# Altium PCB PCB1.PcbDoc
Units mil, origin at the board's own origin, x right, y up, seen from the top; angles counter-clockwise.
Board outline 3450 x 2380 mil, 2 copper layers (Top Layer, Bottom Layer); 52 components, 36 nets, 166 pads, 55 vias.
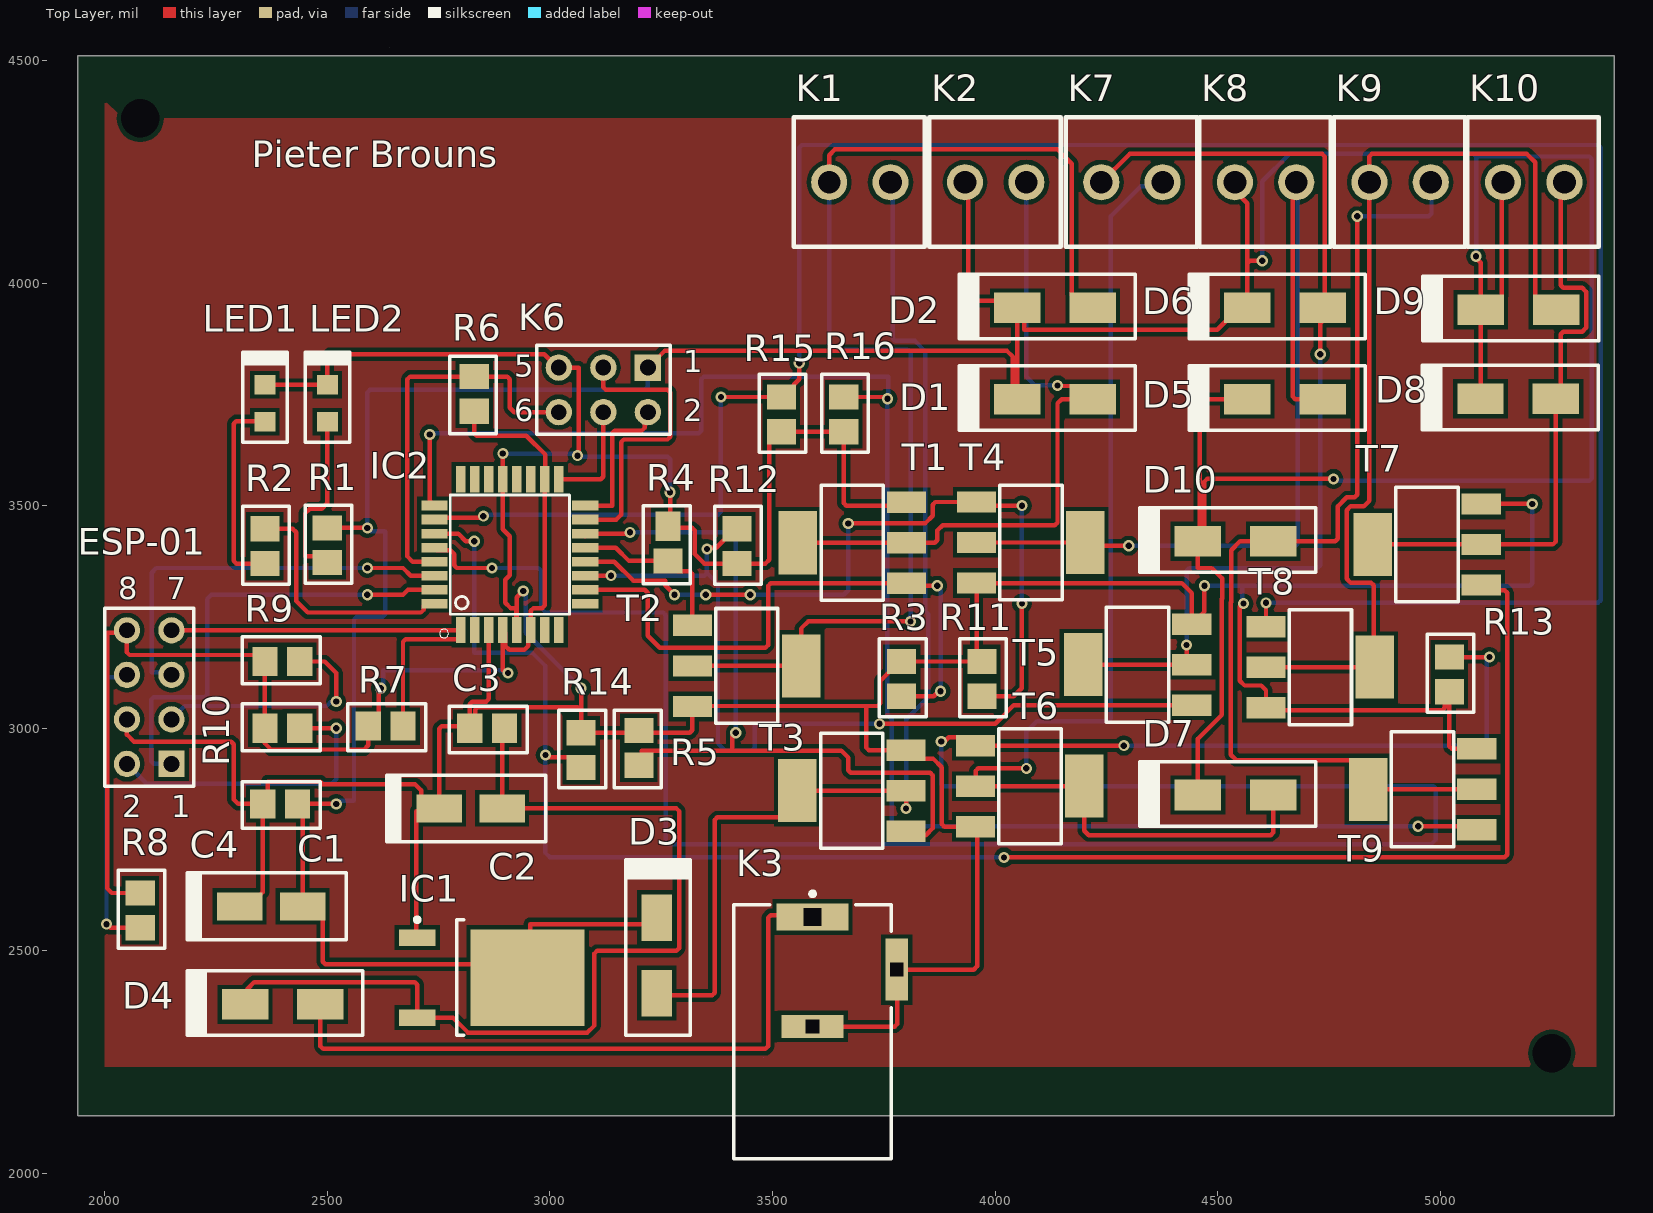
[diagram p0: Top Layer view]
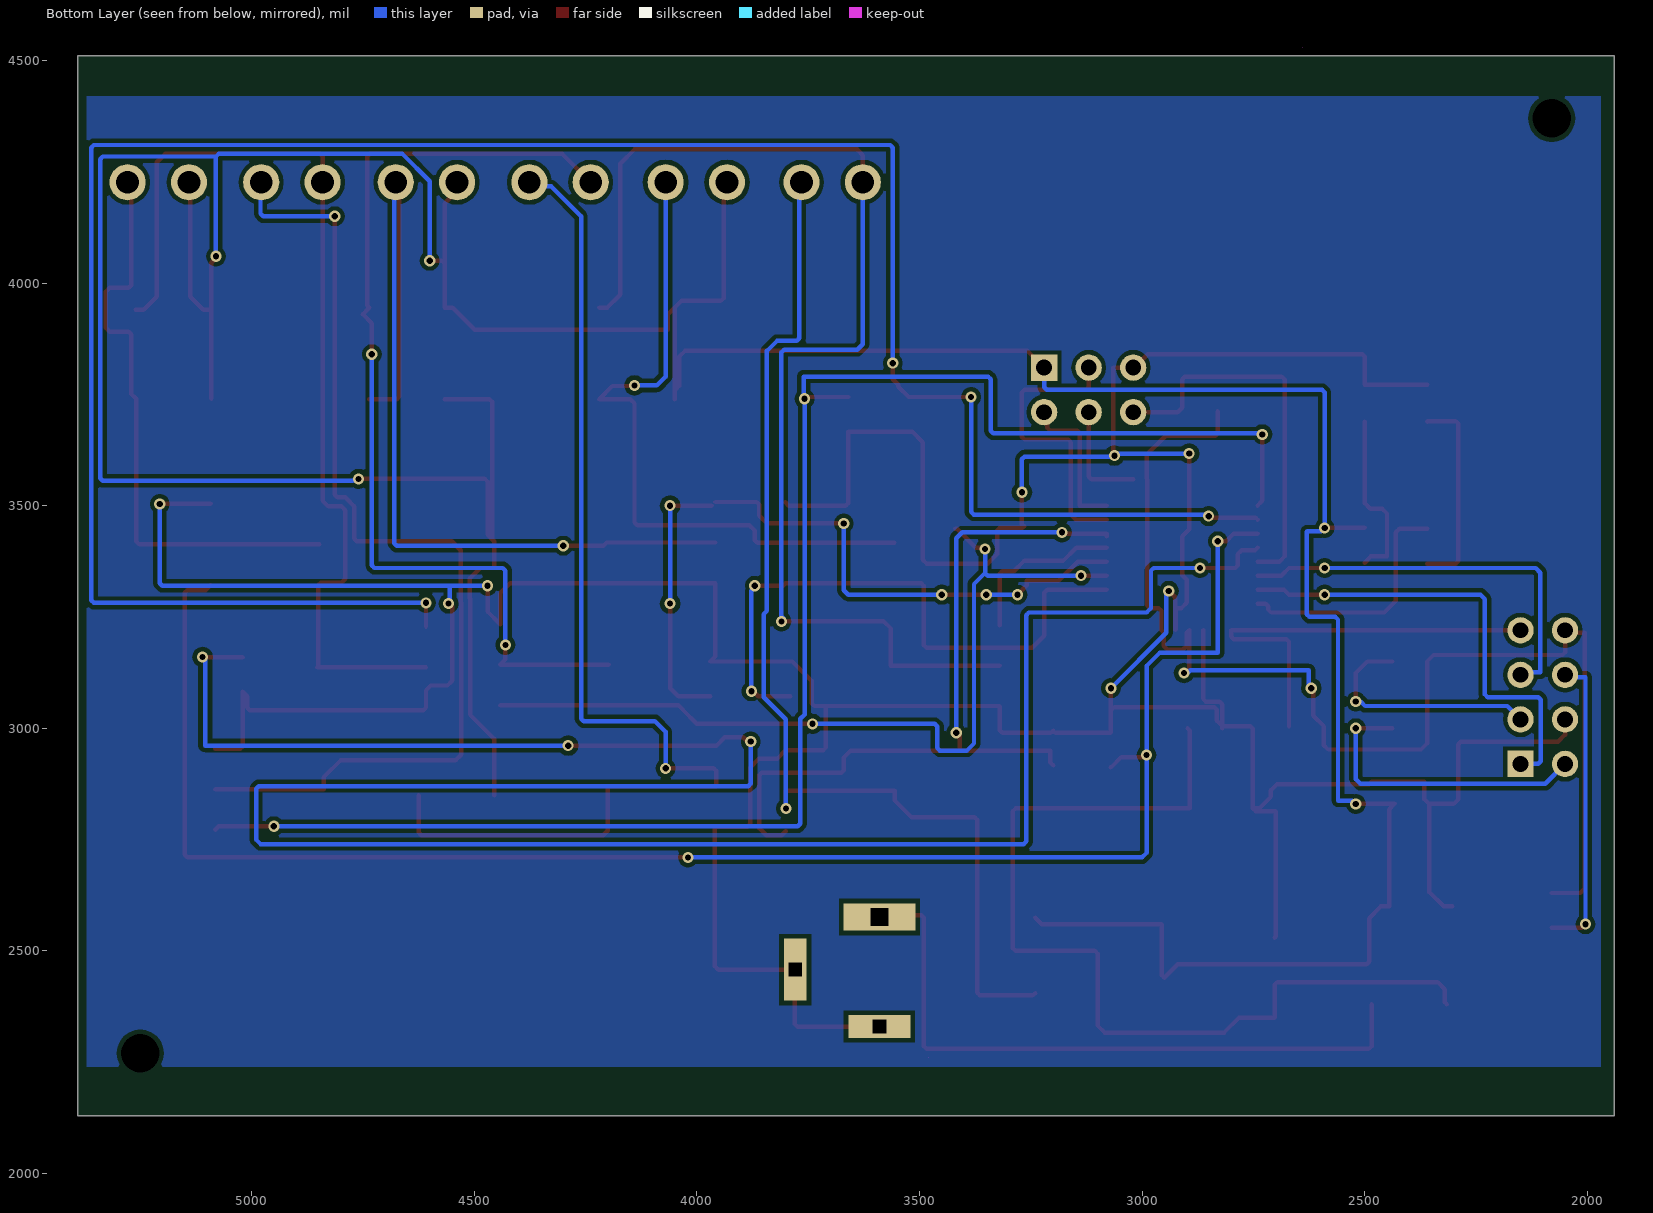
[diagram p1: Bottom Layer view, seen from below]

## Layer stack, top to bottom
Top Solder: solder mask 0.4, Solder Resist, Dk 3.5
Top Layer: signal copper 1.4
Dielectric 1: dielectric 12.6, FR-4, Dk 4.8
Bottom Layer: signal copper 1.4
Bottom Solder: solder mask 0.4, Solder Resist, Dk 3.5

## Board outline
5390,4510 5390,2130 1940,2130 1940,4500 1940,4510
cut-out: 3480,2260
cut-out: 6570,2310
cut-out: 2640,4530

## Design rules (kind name [scope] priority, off if disabled: settings)
Clearance [All] p1: gap=10 ignorepadtopadclearanceinfootprint=TRUE
HoleSize [All] p1: absolutevalues=TRUE maxlimit=200 minlimit=1 maxpercent=80.000 minpercent=20.000
MinimumSolderMaskSliver [All] p1: minsoldermaskwidth=1
PlaneClearance [All] p1: clearance=0
PlaneConnect [All] p1: planeconnectstyle=NoConnect reliefexpansion=20 reliefentries=4 reliefconductorwidth=10 reliefairgap=10
PolygonConnect [All] p1: connectstyle=NoConnect reliefconductorwidth=10 reliefentries=4 polygonreliefangle="90 Angle" airgapwidth=10
RoutingVias [All] p1: holewidth=14 width=25 viastyle="Through Hole" minholewidth=14 minwidth=25 maxholewidth=14 maxwidth=25
SilkToSilkClearance [All] p1: silktosilkclearance=0
SilkToSolderMaskClearance [IsPad] p1: minsilkscreentomaskgap=1 clearancetoexposedcopper=TRUE
SolderMaskExpansion [All] p1: expansion=4 istentingtop=FALSE
Width [All] p1: maxlimit=10 minlimit=10 preferedwidth=10
24 further rules are at their usual default settings.

## Classes and differential pairs
component class extrasheet: D5 D6 D7 D8 D9 D10 K7 K8 K9 K10 R11 R12 R13 R14 R15 R16 T4 T5 T6 T7 T8 T9
component class schema_Project: C1 C2 C3 C4 D1 D2 D3 D4 ESP-01 IC1 IC2 K1 K2 K3 K6 LED1 LED2 R1 R2 R3 R4 R5 R6 R7 R8 R9 R10 T1 T2 T3

## Components (designator, comment, footprint, x,y, rotation, side; value= is the part's Value field where it differs from the comment)
C1 "Cap" C13+R#1 2388.98,2900 r0 top value=100nF
C2 "Cap2" C24 2822.05,2820 r180 top value=10µF
C3 "Cap" C13+R#1 2853.98,3070 r0 top value=100nF
C4 "Cap2" C24 2373.98,2600 r180 top value=10µF
D1 "Diode" Diode 4134.65,3739.29 r180 top
D2 "Diode" Diode 4134.65,3944.29 r180 top
D3 "Diode" Diode 3240,2490 r90 top
D4 "Diode" Diode 2400,2380 r180 top
D5 "Diode" Diode 4650.85,3739.29 r180 top
D6 "Diode" Diode 4650.85,3944.29 r180 top
D7 "Diode" Diode 4540,2850 r180 top
D8 "Diode" Diode 5174.65,3740 r180 top
D9 "Diode" Diode 5175.35,3940 r180 top
D10 "Diode" Diode 4540,3420 r180 top
ESP-01 "K5" HDR2X4 2150,2920 r90 top
IC1 "LD1117DT33T" TO-252_N 2869.29,2439.92 r0 top
IC2 "ATMEGA328P-AU" *QFP80P900X900X120-32N 2910,3390 r90 top
K1 "K1" K12 3627.2,4226.31 r0 top
K2 "K2" K12 3932.2,4226.31 r0 top
K3 "K3" SWITCH-RAPC712X-3_V 3590,2453.03 r0 top
K6 "Header 3X2" HDR2X3 3220,3810 r180 top
K7 "K7" K12 4238.4,4226.31 r0 top
K8 "K8" K12 4538.4,4226.31 r0 top
K9 "K9" K12 4840.61,4226.31 r0 top
K10 "K10" K12 5140.61,4226.31 r0 top
LED1 "LED1" LED 2360,3730 r90 top
LED2 "LED2" LED 2500,3730 r90 top
R1 "Res2" C13+R#1 2430,3406.02 r90 top value=220
R2 "Res2" C13+R#1 2290,3403.98 r90 top value=220
R3 "Res2" C13+R#1 3720,3106.02 r90 top value=10K
R4 "Res2" C13+R#2 3335,3419.8 r270 top value=10K
R5 "Res2" C13+R#1 3270,2961.02 r270 top value=10K
R6 "Res2" C13+R#1 2900,3756.02 r270 top value=10K
R7 "Res2" C13+R#1 2626.02,3075 r0 top value=10K
R8 "Res2" C13+R#1 2010,2586.02 r90 top value=10K
R9 "Res2" C13+R#1 2403.98,3080 r180 top value=10K
R10 "Res2" C13+R#1 2403.98,2930 r180 top value=10K
R11 "Res2" C13+R#1 3900,3106.02 r90 top value=10K
R12 "Res2" C13+R#1 3350,3403.98 r90 top value=10K
R13 "Res2" C13+R#1 4950,3116.02 r90 top value=10K
R14 "Res2" C13+R#1 3000,2946.02 r90 top value=10K
R15 "Res2" C13+R#1 3450,3700 r90 top value=10K
R16 "Res2" C13+R#1 3590,3700 r90 top value=10K
T1 "NDT3055L" *SOT223-4 3679.24,3413.78 r90 top
T2 "NDT3055L" *SOT223-4 3441.7,3142.8 r270 top
T3 "NDT3055L" *SOT223-4 3678.3,2857.2 r90 top
T4 "NDT3055L" *SOT223-4 4080,3420 r270 top
T5 "NDT3055L" *SOT223-4 4320,3140 r90 top
T6 "NDT3055L" *SOT223-4 4077.69,2872.8 r270 top
T7 "NDT3055L" *SOT223-4 4970,3410 r90 top
T8 "NDT3055L" *SOT223-4 4730,3140 r270 top
T9 "NDT3055L" *SOT223-4 4960,2860 r90 top

## Footprints (in the part's own frame and the unit in brackets; to place one, negate y for a bottom-side part, rotate by r counter-clockwise, add the part's x,y. Pads: shape width x height; smd on the part's side, far side on the other; paste and mask are expansions set on the pad)
*QFP80P900X900X120-32N [mm]
  rect 1.5x0.55 smd: 1(-4.3,2.8) 2(-4.3,2) 3(-4.3,1.2) 4(-4.3,0.4) 5(-4.3,-0.4) 6(-4.3,-1.2) 7(-4.3,-2) 8(-4.3,-2.8) 17(4.3,-2.8) 18(4.3,-2) 19(4.3,-1.2) 20(4.3,-0.4) 21(4.3,0.4) 22(4.3,1.2) 23(4.3,2) 24(4.3,2.8)
  rect 0.55x1.5 smd: 9(-2.8,-4.3) 10(-2,-4.3) 11(-1.2,-4.3) 12(-0.4,-4.3) 13(0.4,-4.3) 14(1.2,-4.3) 15(2,-4.3) 16(2.8,-4.3) 25(2.8,4.3) 26(2,4.3) 27(1.2,4.3) 28(0.4,4.3) 29(-0.4,4.3) 30(-1.2,4.3) 31(-2,4.3) 32(-2.8,4.3)
  silkscreen extent -4.75,-3.4 3.4,4
*SOT223-4 [mil]
  rect 48x88 smd: 1(-88.2,-121.7) 2(2.8,-121.7) 3(93.8,-121.7)
  rect 141.73x86.61 smd: 4(2.8,122.31)
  silkscreen extent -126,-70 132,70
C13+R#1 [mm]
  rect 1.44x1.66 smd: 1(-0.863,-1.778) 2(1.117,-1.778)
  silkscreen extent -2.03,-3.17 2.41,-0.51
C13+R#2 [mm]
  rect 1.66x1.44 smd: 1(-0.863,-1.778)
  rect 1.44x1.66 smd: 2(1.117,-1.778)
  silkscreen extent -2.03,-3.18 2.41,-0.51
C24 [mm]
  rect 2.6x1.6 smd: 1(-1.8,0) 2(1.8,0)
  silkscreen extent -4.29,-1.91 4.8,1.91
Diode [mm]
  rect 2.65x1.75 smd: A(-2.15,0) K(2.15,0)
  silkscreen extent -4.57,-1.91 5.46,1.78
HDR2X3 [mm] "Connector; Header; 3x2 Position"
  rect 1.5x1.5 hole 0.9: 1(0,0)
  round 1.5 hole 0.9: 2(0,2.54) 3(2.54,0) 4(2.54,2.54) 5(5.08,0) 6(5.08,2.54)
  silkscreen extent -1.27,-1.27 6.35,3.81
HDR2X4 [mm] "Connector; Header; 4x2 Position"
  rect 1.5x1.5 hole 0.9: 1(0,0)
  round 1.5 hole 0.9: 2(0,2.54) 3(2.54,0) 4(2.54,2.54) 5(5.08,0) 6(5.08,2.54) 7(7.62,0) 8(7.62,2.54)
  silkscreen extent -1.27,-1.27 8.89,3.81
K12 [mm]
  round 2.062 hole 1.3: 1(0,0) 2(3.5,0)
  silkscreen extent -2.03,-3.68 5.46,3.72
LED [mm]
  rect 1.1x1.2 smd: A(-1.05,0) K(1.05,0)
  silkscreen extent -2.23,-1.27 2.92,1.27
SWITCH-RAPC712X-3_V [mm] "CONN, 3-Leads, Body 14.5x9mm"
  rect 4.1x1.55 hole 1.01 square: 1(0,3.125)
  rect 3.55x1.3 hole 0.76 square: 2(0,-3.125)
  rect 1.3x3.55 hole 0.76 square: 3(4.8,0.125)
  silkscreen extent -4.5,-10.67 4.5,4.57, body extent -4.5,-10.68 4.5,3.83, height 11
TO-252_N [mm] "D-PAK, 4-Leads, Body 6.1x6.5mm, Pitch 2.28mm, Lead Span 9.7mm, IPC Medium Density"
  rect 2.1x0.95 smd: 1(-4.25,2.28) 3(-4.25,-2.28)
  rect 6.5x5.5 smd: 4(2.05,0)
  silkscreen extent -4.37,-3.3 -1.6,3.43, body extent -2,-3.3 4.2,3.3, height 2.4

## Part data
C1 C2 C3 C4: "Capacitor", Publisher="Altium Limited"
  C1 C3: LatestRevisionDate=17-Jul-2002, LatestRevisionNote="Re-released for DXP Platform.", PackageDescription="Radial Cap, Thru-Hole; 2 Leads; 0.3 in Pin Spacing", PackageReference=RAD-0.3, Published=8-Jun-2000
  C2 C4: PackageDescription="Capacitor; 2 Leads", PackageReference=CAPR5-4X5, Published=23-Sep-2002
D1 D2 D3 D4 D5 D6 D7 D8 D9 D10: "Default Diode", Code_JEDEC=DO-214-AB, LatestRevisionDate=17-Jul-2002, LatestRevisionNote="Re-released for DXP Platform.", PackageDescription="DO-214-AB/SMC; 2 C-Bend Leads; Body 7.9 x 5.9 mm, inc. leads (LxW)", PackageReference=SMC, PackageVersion=Sep-1996, Published=8-Jun-2000, Publisher="Altium Limited"
IC1: library part CMP-0244-00088-1, "Fixed Low Drop Positive Voltage Regulator, 3.3V, 3-Pin DPAK, Tape and Reel", ComponentLink1Description="Manufacturer URL", ComponentLink1URL=http://www.st.com, ComponentLink2Description=Datasheet, ComponentLink2URL=http://www.st.com/internet/com/TECHNICAL_RESOURCES/TECHNICAL_LITERATURE/DATASHEET/CD00000544.pdf, DatasheetVersion=1/11/2011, PackageDescription="3-Pin Transistor Outline Package 2.28 mm Pitch, 9.7 mm Lead Span (DPAK)", PackageReference=TO-252, PackageVersion=2011
IC2: library part Component_1
K1 K2 K7 K8 K9 K10: library part "Header 2", "Header, 2-Pin", LatestRevisionDate=17-Jul-2002, LatestRevisionNote="Re-released for DXP Platform.", Publisher="Altium Limited"
K3: library part CMP-2000-05384-1, "Power Jack, 5 A, 3-Pin THD, RoHS, Bulk", Color=Black, Current Rating=5A, Manufacturer=Switchcraft, Standard Package=2,500, Catalog Drawings="RAPC7(1,2)2XSide /  / RAPC7(1,2)2XTop", Category=Connectors,Interconnects, Connector Type=Jack, Contact Material=Brass, Contact Material - Plating=Nickel, Datasheet URL=http://www.mouser.com/ds/2/393/rapc722x_cd-371352.pdf, Datasheet Version="Rev. A, 08/2005", Dynamic Catalog=SwitchcraftInc, Family=Barrel-PowerConnectors, Gender=Male, Housing Color=Black, Housing Material=Thermoplastic, Internal Switch(s)=SingleSwitch,NormallyClosed, Manufacturer URL=http://www.switchcraft.com/, Mating Products="S765-ND / -CONNPLUGMINIPWR2CONDWHT/RED / S760K-ND / -CONNPOWERPLUGMINI.08\"BLACK / SC1052-ND / -CONNPOWERPLUGMINIBLACK", Mounting Type=ThroughHole,RightAngle, Number of Positions/Contacts=2Conductors,2Contacts, Other Names="Q2287470A / RAPC722X-ND / SC1313", Plug/Mating Plug Diameter=2.1mmID,5.5mmOD, RoHS Information=SwitchcraftRoHSInfo, Shielding=Unshielded, Termination=SolderEyelet(s)
K6: "Header, 3-Pin, Dual row", LatestRevisionDate=17-Jul-2002, LatestRevisionNote="Re-released for DXP Platform.", Publisher="Altium Limited"
LED1: "Typical RED GaAs LED", LatestRevisionDate=08-Jul-2005, LatestRevisionNote="Mech Layer 1 removed.", PackageDescription="LED; 2 Leads", PackageReference=LED-1, Published=8-Jun-2000, Publisher="Altium Limited"
LED2: "Typical RED, GREEN, YELLOW, AMBER GaAs LED", LatestRevisionDate=17-Jul-2002, LatestRevisionNote="Re-released for DXP Platform.", PackageDescription="SM LED; 2 Flat Leads", PackageReference=3.2X1.6X1.1, PackageVersion=Feb-2002, Published=8-Jun-2000, Publisher="Altium Limited"
R1 R2 R3 R4 R5 R6 R7 R8 R9 R10 R11 R12 R13 R14 R15 R16: "Resistor", LatestRevisionDate=17-Jul-2002, LatestRevisionNote="Re-released for DXP Platform.", PackageDescription="Axial Device, Thru-Hole; 2 Leads; 0.4 in Pin Spacing", PackageReference=AXIAL-0.4, Published=8-Jun-2000, Publisher="Altium Limited"
T1 T2 T3 T4 T5 T6 T7 T8 T9: SnapEDA_Link=https://www.snapeda.com/parts/NDT3055L/ON%20Semiconductor/view-part/2773473/?ref=snap

## Free pads (board coordinates)
  round 0 hole 86.61: 2(2080,4370) 2(5250,2270)

## Via types
v1: diameter 25, hole 14, Top Layer to Bottom Layer, 55 vias

## Nets (pads, with @x,y where several pads share a name; then routed paths per layer and width w, separated by ;. In a path a pad name is that pad's centre, name@x,y a point inside that pad or via, vN(x,y) a via of type N, cw(c..) or ccw(c..) an arc to the next point about the centre after c; other vN are vias at no path point)
3.3V: C1.2 C4.1 D1.K D2.K D3.K D5.K D6.K D7.K D8.K D9.K D10.K IC1.4 K2.1 K6.1 K8.1 K10.1 R1.2 | length 10204.3
  Top Layer w10: R1.2 v1(2590,3450) ; v1(2520,2830) C1.2 2444.84,2818.11 C4.1 2463.5,2600 2490,2573.5 2490,2475.86 2495.86,2470 2919.92,2470 IC1.4 2955.86,2445.78 2955.86,2560 3225.35,2560 D3.K ; K6.1 3257.5,3847.5 4026.64,3847.5 4040,3834.14 4040,3768.74 4048.74,3760 D1.K@4050,3760 ; K2.1 3940,4218.52 3940,3965.86 3945.86,3960 4034.29,3960 D2.K ; D1.K D1.K@4050,3760 ; D7.K 4455.35,2976.24 4509.3,3030.19 4509.3,3290.71 4510,3291.41 4510,3336.57 4486.57,3360 4455.35,3360 D10.K D10.K@4460,3424.65 ; K8.1 4538.4,4207.05 4566.2,4179.25 4566.2,4043.8 ; D5.K 4465.86,3739.29 4460,3733.43 D10.K@4460,3424.65 ; v1(4600,4050) 4572.4,4050 4566.2,4043.8 ; v1(4760,3560) 4475.86,3560 4470,3554.14 4470,3434.65 D10.K@4460,3424.65 ; v1(5080,4060) 5080,4055.94 5090.71,4045.23 D9.K ; D8.K 5090.71,3740.71 D9.K ; K10.1 5137.87,4223.58 5137.87,3969.45 5108.42,3940 D9.K ; D1.K@4050,3760 D2.K ; D2.K 4065.16,3929.14 4065.16,3894.84 4499.03,3894.84 4548.48,3944.29 D6.K 4566.2,4043.8
  Bottom Layer w10: v1(2520,2830) 2527.65,2837.65 2559.37,2837.65 2560,2838.28 2560,3244.14 2565.86,3250 2624.14,3250 2630,3255.86 2630,3441.72 2629.37,3442.35 2597.65,3442.35 v1(2590,3450) 2590,3754.14 2595.86,3760 3214.14,3760 3220,3765.86 K6.1 ; v1(4600,4050) 4600,4228.73 4661.27,4290 5074.14,4290 5080,4284.14 ; v1(4760,3560) 4762.87,3557.13 4772.09,3557.13 4773.36,3555.86 5334.14,3555.86 5340,3561.72 5340,4278.28 5334.14,4284.14 5080,4284.14 ; v1(5080,4060) 5080,4284.14
12V: D4.A K3.1 | length 1496.7
  Top Layer w10: D4.A 2484.65,2285.86 2490.5,2280 3484.14,2280 3490,2285.86 3490,2574.14 3495.86,2580 3586.06,2580 K3.1
GND: C1.1 C2.2 C3.1 C4.2 ESP-01.4 IC1.1 IC2.3 IC2.5 IC2.21 K3.2 K3.3 K6.5 LED1.K LED2.K R3.2 R4.1 R5.1 R11.2 R12.1 R13.1 R14.2 R15.1 R16.1 T1.3 T2.3 T3.3 T4.3 T5.3 T6.3 T7.3 T8.3 T9.3 | length 10955.5
  Top Layer w10: ESP-01.4 2050,2985.86 2065.86,2970 2284.14,2970 2290,2964.14 2290,2840 2300,2830 C1.1 ; C4.2 2322.8,2600 2355,2632.21 C1.1 ; LED1.K LED2.K 2500,3834.14 2505.86,3840 2987.03,3840 3017.03,3810 K6.5 3064.14,3810 3064.53,3809.61 v1@3064.53,3614.53 ; IC1.1 2700,2531.65 2700,2814.14 2745.32,2814.14 C2.2 ; C3.1 C3.1@2820,3005 ; IC2.3 2862.76,3065.86 2856.9,3060 2825.86,3060 2820,3054.14 C3.1@2820,3005 ; v1(2894.25,3617.06) IC2.21 2894.25,3446.97 2910,3431.22 2910,3343.43 2900,3333.43 2900,3281.61 2911.61,3270 2924.14,3270 2924.14,3222.31 IC2.5 2925.75,3294.25 v1(2940,3308.5) ; v1(3070,3090) 3070,3040 ; v1(3270,3530) 3270,3458.78 R4.1 3268.78,3450 3319.4,3450 3325.26,3444.14 3325.26,3391.37 3346.62,3370 R12.1 3484.14,3370 3492.32,3378.18 3492.32,3642.68 3515.67,3666.02 R15.1 R16.1 3660,3505.86 3665.86,3500 3793.36,3500 T1.3 ; K3.2 3774.14,2330 3780,2335.86 3780,2456.93 K3.3 3952.05,2457.95 3960,2465.9 3960,2774.99 T6.3 3885.86,2779 3880,2784.86 3880,2912.43 3860.43,2932 3819,2932 T3.3 3715.86,2951 3710,2956.86 3710,3050 ; v1(4470,3320) 4470,3262.1 T5.3 4441.7,3303.65 4419.15,3326.2 T4.3 3958.3,3161.7 R11.2 R3.2 3785.67,3150 3742.32,3106.65 3742.32,3055.86 3736.46,3050 3710,3050 ; v1(4557.5,3280) 4555.16,3280 4549.3,3274.14 4549.3,3106.99 4560.19,3096.09 4597.41,3096.09 4608.3,3085.2 T8.3 4614.5,3040 5004.14,3040 5010,3045.86 5010,3072.05 R13.1 5020,2959.66 5025.86,2953.8 T9.3 ; T7.3 v1(5206.2,3503.8) ; C1.1 2365.86,2840.86 2365.86,2880 2484.14,2880 2490,2874.14 2697.04,2874.14 2710.54,2860.64 2710.54,2846.5 2737.04,2820 C2.2 ; C2.2 2751.18,2998.82 2757.36,3005 C3.1@2820,3005 ; C3.1@2820,3005 2831.82,3016.82 2831.82,3041.82 2837.68,3047.68 3062.32,3047.68 3070,3040 ; 3070,3040 R14.2 3195,2990 R5.1 3205,2990 3314.14,2990 3320,2995.86 T2.3 3321,3050 3710,3050
  Bottom Layer w10: v1(2894.25,3617.06) 3057.46,3617.06 v1(3062.26,3612.26) 3064.53,3610 3264.14,3610 3270,3604.14 v1(3270,3530) ; v1(2940,3308.5) 2945.75,3302.76 2945.75,3214.25 v1(3070,3090) ; v1(4470,3320) 4554.63,3320 ; v1(4557.5,3280) 4554.63,3282.87 4554.63,3320 ; v1(5206.2,3503.8) 5206.2,3325.86 5200.34,3320 4554.63,3320
NetC2_1: C2.1 C3.2 D4.K IC1.3 | length 2165.9
  Top Layer w10: D4.K 2320,2384.65 2320,2414.14 2335.86,2430 2696.11,2430 2701.97,2424.14 IC1.3 2782.33,2350.16 2815.83,2316.65 3084.17,2316.65 3100,2332.49 3100,2494.14 3105.86,2500 3284.14,2500 3290,2505.86 3290,2814.14 3284.14,2820 C2.1 2892.91,2994.96 C3.2
NetD1_A: D1.A K2.2 T1.2 T1.4 | length 1572.3
  Top Layer w10: T1.4 T1.2 3864.14,3416.58 3870,3422.44 3870,3444.14 3882.06,3456.2 4134.14,3456.2 4140,3462.06 4140,3730 4149.29,3739.29 D1.A 4189.84,3768.74 4141.26,3768.74 v1(4140,3770)
  Bottom Layer w10: K2.2 4070,3790 4090,3770 v1(4140,3770)
NetD2_A: D2.A K1.1 T2.2 T2.4 | length 2721.4
  Top Layer w10: T2.2 T2.4 3564.01,3224.01 3580,3240 v1(3810,3240) ; K1.1 3627.2,4287.2 3640,4300 4140,4300 4172.13,4267.87 4172.13,3973.74 4201.58,3944.29 D2.A
  Bottom Layer w10: K1.1 3627.2,3862.8 3640,3850 3804.14,3850 3810,3844.14 3810,3251.38 3804.31,3245.69 v1(3810,3240)
NetD3_A: D3.A K1.2 T3.2 T3.4 | length 2521
  Top Layer w10: D3.A 3245.35,2400 3364.14,2400 3370,2405.86 3370,2794.14 3375.86,2800 3517.68,2800 3555.99,2838.31 T3.4 T3.2 v1(3800,2820)
  Bottom Layer w10: K1.2 3770,4221.31 3770,3875.86 3775.86,3870 3820,3870 3842.5,3847.5 3842.5,3264.07 3850,3256.57 3850,3070 3800,3020 v1(3800,2820)
NetD5_A: D5.A K8.2 T4.2 T4.4 | length 2093.2
  Top Layer w10: T4.2 T4.4 4209.51,3410 v1(4300,3410) ; K8.2 4668.33,4218.44 4668.33,3745.15 4674.18,3739.29 D5.A
  Bottom Layer w10: v1(4300,3410) 4674.14,3410 4680,3415.86 4680,4222.51 K8.2
NetD6_A: D6.A K7.1 T5.2 T5.4 | length 2229.9
  Top Layer w10: T5.4 T5.2 4430,3154.5 v1(4430,3187.3) ; K7.1 4302.09,4290 4734.14,4290 4740,4284.14 4740,3948.8 D6.A 4750,3929.78 4730,3909.78 v1(4730,3840)
  Bottom Layer w10: v1(4430,3187.3) 4430,3354.14 4435.86,3360 4724.14,3360 4730,3365.86 v1(4730,3840)
NetD7_A: D7.A K7.2 T6.2 T6.4 | length 2570.2
  Top Layer w10: v1(4070,2910) 3961.85,2910 3955.99,2904.14 T6.2 T6.4 4200,2770 4210,2760 4618.79,2760 4624.65,2765.86 D7.A
  Bottom Layer w10: v1(4070,2910) 4070,2991.72 4094.14,3015.86 4254.14,3015.86 4260,3021.72 4260,4150 4326.95,4216.95 4366.84,4216.95 K7.2
NetD8_A: D8.A K10.2 T7.2 T7.4 | length 1328.7
  Top Layer w10: T7.4 T7.2 5252.8,3412.8 5259.29,3419.29 D8.A 5270,3750.71 5270,3884.69 5275.86,3890.55 5318.38,3890.55 5327.17,3899.34 5327.17,3980.66 5318.38,3989.45 5275.86,3989.45 5270,3995.31 5270,4217.91 K10.2 K10.2@5280,4224.72
NetD9_A: D9.A K9.1 T8.2 T8.4 | length 2235.6
  Top Layer w10: T8.2 T8.4 4850,3139.51 4850,3321.08 4844.14,3326.93 4798.17,3326.93 4789.38,3335.72 4789.38,3489.88 4798.17,3498.67 4828.28,3498.67 4840.61,3510.99 K9.1 4840,4226.92 4850,4236.92 4840,4246.92 4840,4284.14 4845.86,4290 5194.14,4290 5212.83,4271.31 5212.83,3969.45 5242.28,3940 D9.A
NetD10_A: D10.A K9.2 T9.2 T9.4 | length 2303.4
  Top Layer w10: v1(4813.11,4150) 4813.11,3524.52 4807.25,3518.67 4789.89,3518.67 4769.38,3498.16 4769.38,3425.86 4763.53,3420 D10.A 4550,3420 4530,3400 4530,3283.13 4529.3,3282.43 4529.3,2940.7 4541.33,2928.67 4799.38,2928.67 4837.69,2890.36 T9.4 T9.2
  Bottom Layer w10: v1(4813.11,4150) 4974.14,4150 4980,4155.86 4980,4224.72 K9.2
NetESP-01_1: ESP-01.1 IC2.31 | length 1050.2
  Top Layer w10: v1(2590,3300) 2670,3300 2681.26,3311.26 IC2.31
  Bottom Layer w10: ESP-01.1 2110.39,2920 2104.53,2925.86 2104.53,3064.14 2110.39,3070 2224.14,3070 2230,3075.86 2230,3290 2240,3300 v1(2590,3300)
NetESP-01_2: ESP-01.2 R10.1 | length 688.9
  Top Layer w10: R10.1 v1(2520,3000)
  Bottom Layer w10: ESP-01.2 2094.53,2875.47 2509.61,2875.47 2520,2885.86 v1(2520,3000)
NetESP-01_3: ESP-01.3 R9.1 | length 543.5
  Top Layer w10: R9.1 2494.14,3150 2520,3124.14 v1(2520,3060)
  Bottom Layer w10: ESP-01.3 2180,3050 2499.18,3050 2509.18,3060 v1(2520,3060)
NetESP-01_5: ESP-01.5 IC2.30 | length 917.4
  Top Layer w10: v1(2590,3360) 2670,3360 2687.24,3342.76 IC2.30
  Bottom Layer w10: ESP-01.5 2144.14,3125.86 2105.47,3125.86 2105.47,3349.61 2115.86,3360 v1(2590,3360)
NetESP-01_6: ESP-01.6 R8.1 | length 681.6
  Top Layer w10: v1(2004.1,2560) 2012.05,2552.05 R8.1
  Bottom Layer w10: v1(2004.1,2560) 2004.1,3114.1 2044.1,3114.1 ESP-01.6
NetESP-01_7: ESP-01.7 IC2.1 R7.2 | length 988.7
  Top Layer w10: ESP-01.7 2799.06,3220 IC2.1 2799.76,3205.83 2793.94,3200 2675.86,3200 2670,3194.14 R7.2
NetESP-01_8: ESP-01.8 IC2.4 IC2.6 IC2.18 R6.2 R7.1 R8.2 R9.2 R10.2 | length 2834.8
  Top Layer w10: R8.2 2015.86,2630 2005.47,2640.39 2005.47,3214.14 2044.14,3214.14 ESP-01.8 2050,3170.39 2055.86,3164.53 2345.47,3164.53 R9.2 R10.2 2360,2965.86 2373.54,2952.32 2582.32,2952.32 2592.05,2962.05 R7.1 2615.39,3028.35 2615.39,3085.39 v1(2620,3090) ; R6.2 2830,3662.92 2835.86,3657.06 2947.08,3657.06 2990,3614.14 2990,3560.55 IC2.18 2988.74,3275.86 2982.88,3270 2963.1,3270 2957.24,3264.14 IC2.6 2951.57,3215.04 2951.57,3184.97 2942.79,3176.18 2908.71,3176.18 2899.92,3184.97 2899.92,3215.04 IC2.4 2894.25,3130.11
  Bottom Layer w10: v1(2620,3090) 2625.86,3095.86 2625.86,3130 2891.5,3130 2901.5,3120 v1(2905.75,3124.25)
NetIC2_10: IC2.10 R3.1 T1.1 | length 1373
  Top Layer w10: IC2.10 3212.88,3311.26 3220,3304.14 3220,3208 3246.93,3181.07 3484.14,3181.07 3490,3186.93 3490,3319.72 3495.86,3325.58 T1.1 3806.52,3320 v1(3870,3320) ; R3.1 3862.05,3072.05 3870,3080 3870.33,3080 3873.44,3083.11 v1(3877.5,3083.11)
  Bottom Layer w10: v1(3870,3320) 3870,3315.94 3877.5,3308.44 v1(3877.5,3083.11)
NetIC2_13: IC2.13 R4.2 T2.1 | length 380.8
  Top Layer w10: IC2.13 3147.68,3405.75 3177.61,3375.83 R4.2 3288.35,3352.48 3314.14,3352.48 3320,3346.62 T2.1
NetIC2_14: IC2.14 R5.2 T3.1 | length 1748.1
  Top Layer w10: IC2.14@3079.29,3431.57 IC2.14 3177.24,3437.24 v1(3180,3440) ; R5.2 3205.86,2922.91 3205.86,2950 3410,2950 ; v1(3417.5,2990) 3410,2982.5 3410,2950 ; T3.1 3809,2760 3844.14,2760 3860,2775.86 3860,2894.14 3854.14,2900 3675.86,2900 3670,2905.86 3670,2934.14 3654.14,2950 3410,2950
  Bottom Layer w10: v1(3180,3440) 3404.14,3440 3417.5,3426.64 v1(3417.5,2990)
NetIC2_15: IC2.15 K6.3 | length 661.6
  Top Layer w10: IC2.15 3148.74,3468.74 3160,3480 3160,3642.75 3165.86,3648.61 3264.14,3648.61 3270,3654.47 3270,3754.14 3264.14,3760 3125.86,3760 3120,3765.86 K6.3
NetIC2_16: IC2.16 K6.2 | length 339.6
  Top Layer w10: IC2.16 3079.53,3500 3140,3500 3140,3662.75 3145.86,3668.61 3206.7,3668.61 3212.56,3674.47 3212.56,3702.56 K6.2
NetIC2_17: IC2.17 K6.4 | length 247
  Top Layer w10: IC2.17 3114.14,3559.29 3120,3565.15 K6.4
NetIC2_29: IC2.29 K6.6 R6.1 | length 876.9
  Top Layer w10: IC2.29 2691.61,3374.25 2680,3385.86 2680,3784.14 2685.86,3790 R6.1 2904.14,3790 2910,3784.14 2910,3720 2920,3710 K6.6
NetIC2_32: IC2.32 R2.2 | length 561.8
  Top Layer w10: R2.2 2422.05,3447.95 2430,3440 2430,3285.86 2455.86,3260 2710.32,3260 2716.18,3265.86 2716.18,3273.94 2722.01,3279.76 IC2.32
NetLED1_A: LED1.A R2.1 | length 453.7
  Top Layer w10: R2.1 2295.86,3370 2290,3375.86 2290,3684.14 2295.86,3690 2358.66,3690 LED1.A
NetLED2_A: LED2.A R1.1 | length 394.7
  Top Layer w10: R1.1 2486.19,3385.86 2450,3385.86 2450,3482.24 2461.11,3493.35 2487.49,3493.35 2500,3505.86 LED2.A
PB0: IC2.12 R11.1 T4.1 | length 1705.3
  Top Layer w10: IC2.12 3144.64,3374.25 3187.63,3331.26 3258.74,3331.26 3258.74,3321.26 v1(3280,3300) ; v1(3350,3300) v1(3450,3300) ; v1(3670,3460) 3842.57,3460 3859.94,3477.37 3859.94,3502.34 3865.8,3508.2 T4.1 ; T4.1@3966.5,3500 v1(4060,3500) ; R11.1 4042.05,3072.05 4060,3090 v1(4060,3280)
  Bottom Layer w10: v1(3280,3300) v1(3350,3300) ; v1(3450,3300) 3660,3300 3670,3310 v1(3670,3460) ; v1(4060,3280) v1(4060,3500)
PC2: IC2.25 R16.2 T9.1 | length 3744.6
  Top Layer w10: v1(2730,3660) 2730,3510.94 IC2.25 ; R16.2 3753.98,3743.98 v1(3757.95,3740) ; v1(4950,2780) 5073.5,2780 T9.1
  Bottom Layer w10: v1(2730,3660) 2732.26,3662.26 3334.14,3662.26 3340,3668.12 3340,3784.14 3345.86,3790 3760,3790 3760,3742.05 v1(3757.95,3740) 3757.95,3030.94 3767.5,3021.39 3767.5,2785.86 3773.36,2780 v1(4950,2780)
PC3: IC2.26 R15.2 T8.1 | length 5252.8
  Top Layer w10: IC2.26 2744.53,3472.56 2846.72,3472.56 v1(2850.54,3476.37) ; v1(3383.98,3743.98) R15.2 3524.33,3743.98 3547.68,3767.32 3547.68,3771.65 3560,3783.98 v1(3560,3820) ; T8.1 v1(4608.3,3281.7)
  Bottom Layer w10: v1(2850.54,3476.37) 2854.17,3480 3378.12,3480 3383.98,3485.86 v1(3383.98,3743.98) ; v1(3560,3820) 3560,4304.14 3565.86,4310 5354.14,4310 5360,4304.14 5360,3287.56 5354.14,3281.7 v1(4608.3,3281.7)
PC4: IC2.27 R14.1 T7.1 | length 3850.9
  Top Layer w10: IC2.27 2794,3437.24 2811.24,3420 v1(2830,3420) ; v1(2990,2940) 2994.61,2935.39 3046.65,2935.39 R14.1 ; v1(4020,2710) 5144.14,2710 5150,2715.86 5150,3304.14 5144.14,3310 5103.5,3310 T7.1
  Bottom Layer w10: v1(2830,3420) 2830,3170 2960,3170 2990,3140 v1(2990,2940) 2990,2720 3000,2710 v1(4020,2710)
PC5: IC2.28 R13.2 T6.1 | length 5743.8
  Top Layer w10: IC2.28 2746.38,3400.08 2776.45,3400.08 2785.24,3391.29 2785.24,3365.86 2791.09,3360 v1(2870,3360) ; v1(3879,2970) 3885.73,2970 3895.73,2980 3936.99,2980 T6.1 v1(4289,2961) ; R13.2 v1(5110,3160)
  Bottom Layer w10: v1(2870,3360) 2974.14,3360 2980,3354.14 2980,3270 2990,3260 3254.14,3260 3260,3254.14 3260,2745.86 3265.86,2740 4980,2740 4990,2750 4990,2864.14 4984.14,2870 3884.86,2870 3879,2875.86 v1(3879,2970) ; v1(4289,2961) 5104.14,2961 5104.14,3154.14 v1(5110,3160)
PD7: IC2.11 R12.2 T5.1 | length 1952.8
  Top Layer w10: IC2.11 v1(3137.24,3342.76) ; v1(3352.76,3402.76) 3355.63,3405.63 3373.34,3405.63 3415.67,3447.95 R12.2 ; v1(3740,3010) 4000,3010 4030,3040 4030,3040.54 4041.26,3051.8 T5.1
  Bottom Layer w10: v1(3137.24,3342.76) 3140,3340 3142.76,3342.76 3346.9,3342.76 3352.76,3348.61 ; v1(3352.76,3402.76) 3352.76,3348.61 ; v1(3740,3010) 3465.86,3010 3460,3004.14 3460,2955.86 3454.14,2950 3393.43,2950 3377.5,2965.93 3377.5,3323.87 3352.76,3348.61
pads on no net: IC2.2 IC2.7 IC2.8 IC2.9 IC2.19 IC2.20 IC2.22 IC2.23 IC2.24

## Polygon pours and split planes (outlines as drawn)
GND on Bottom Layer "GND_L02_P002" (solid, pour order 2): 5370,4420 5370,2240 5310,2240 1970,2240 1970,4420
GND on Top Layer "GND_L01_P000" (solid, pour order 0): 2000,4410 2040,4370 5350,4370 5350,2240 2000,2240

## Silkscreen, mask and mechanical layers (free items; w line width, h text height)
Top Overlay:
  text "Pieter Brouns" at 2330,4260 h60
boardoutline:
  lines w10: 1940,2130 5390,2130 5390,4510 1940,4510 1940,2130

## Text inside footprints (layer, text, board x,y; h text height)
ESP-01: Top Overlay "2" at 2040,2800 h50; Top Overlay "1" at 2150,2800 h50; Top Overlay "7" at 2140,3290 h50; Top Overlay "8" at 2030,3290 h50
K6: Top Overlay "6" at 2920,3690 h50; Top Overlay "5" at 2920,3790 h50; Top Overlay "2" at 3300,3690 h50; Top Overlay "1" at 3300,3800 h50